# Altium PCB Button.PcbDoc
Units mil, origin at the board's own origin, x right, y up, seen from the top; angles counter-clockwise.
Board outline 5000 x 3000 mil, 2 copper layers (Top Layer, Bottom Layer), stack 61.756 mil thick; 11 components, 7 nets, 37 pads, 0 vias.
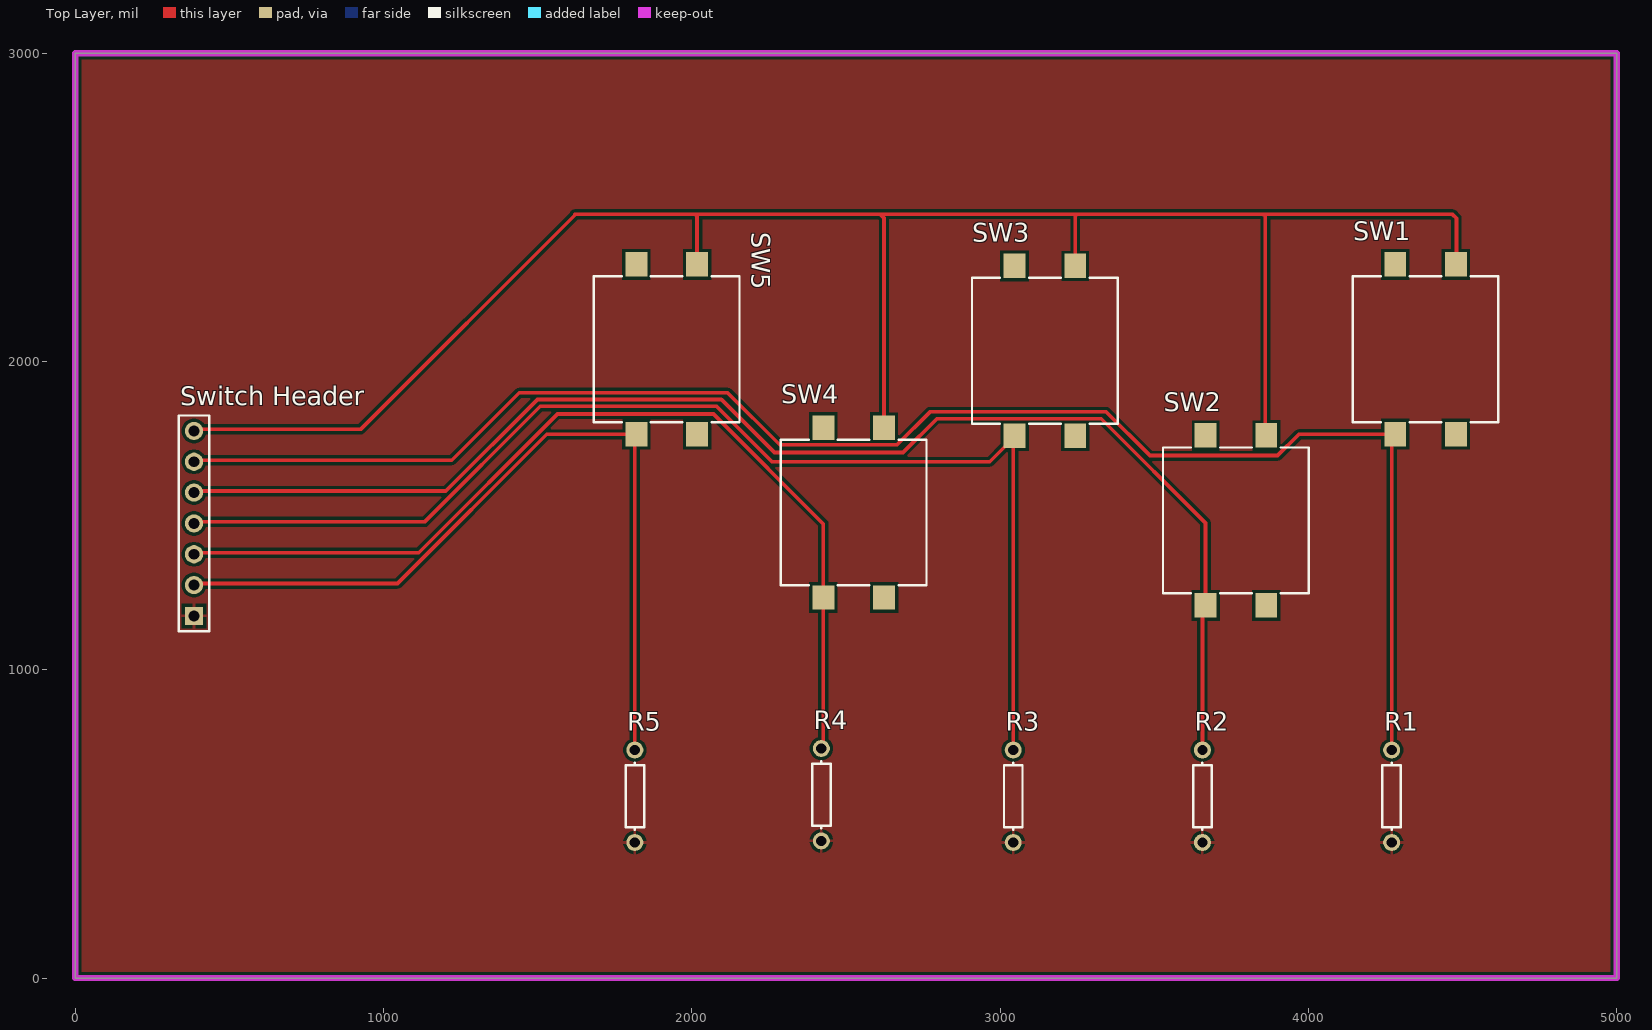
[diagram p0: Top Layer view]
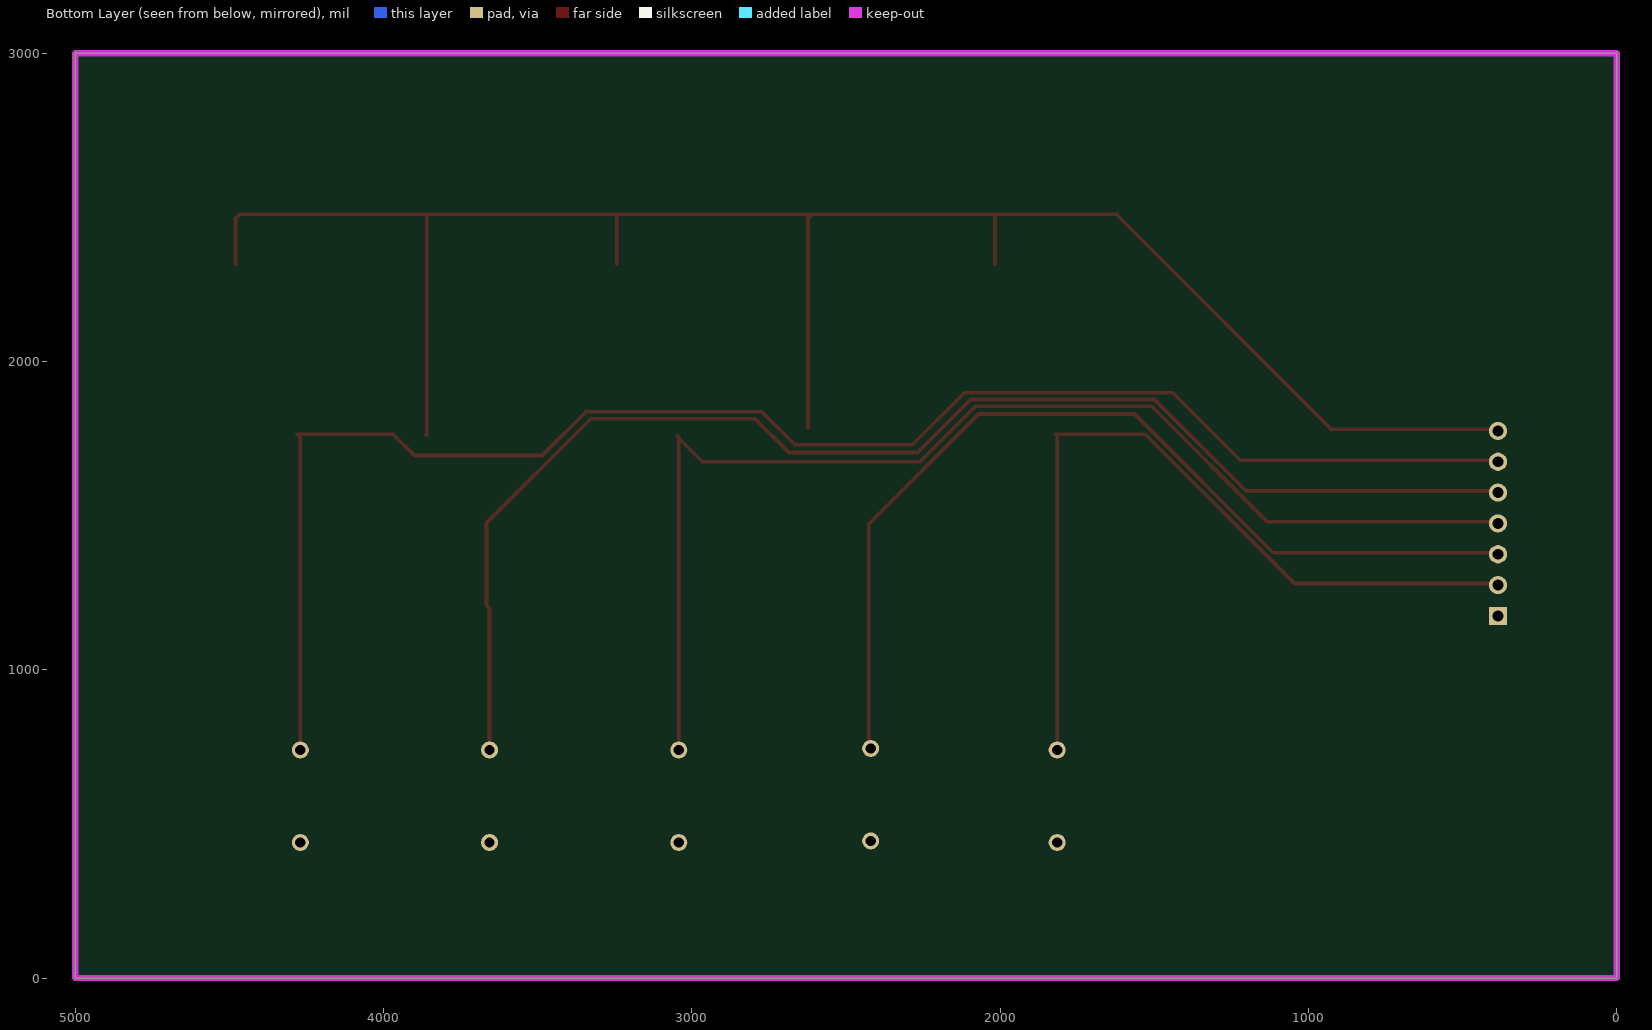
[diagram p1: Bottom Layer view, seen from below]

## Layer stack, top to bottom
Top Solder: solder mask 1, SM-001, Dk 4
Top Layer: signal copper 1.378
Dielectric 1: core 59, Core-043, Dk 4.3
Bottom Layer: signal copper 1.378
Bottom Solder: solder mask 1, SM-001, Dk 4

## Board outline
0,0 5000,0 5000,3000 0,3000

## Design rules (kind name [scope] priority, off if disabled: settings)
Clearance [All] p1: gap=10 ignorepadtopadclearanceinfootprint=FALSE except(0: Arc-Hole Track-Hole SMDPad-Hole THPad-Hole Via-Hole Fill-Hole Poly-Hole Region-Hole Text-Hole)
PolygonConnect [All] p1: connectstyle=Relief reliefconductorwidth=10 reliefentries=4 polygonreliefangle="90 Angle" airgapwidth=10
RoutingVias [All] p1: holewidth=28 width=50 viastyle="Through Hole" minholewidth=28 minwidth=50 maxholewidth=28 maxwidth=50
SolderMaskExpansion [All] p1: expansion=4 istentingtop=FALSE
Width [All] p1: maxlimit=10 minlimit=10 preferedwidth=10
30 further rules are at their usual default settings.

## Components (designator, comment, footprint, x,y, rotation, side; value= is the part's Value field where it differs from the comment)
R1 "Res1" AXIAL-0.3 4270,590 r270 top value=1K
R2 "Res1" AXIAL-0.3 3656.25,590 r270 top value=1K
R3 "Res1" AXIAL-0.3 3042.5,590 r270 top value=1K
R4 "Res1" AXIAL-0.3 2420,595 r270 top value=1K
R5 "Res1" AXIAL-0.3 1815,590 r270 top value=1K
SW1 "430172073816" WS-TASV_L12W12H7.3_4301x20738x6 4380,2040 r270 top
SW2 "430172073816" WS-TASV_L12W12H7.3_4301x20738x6 3764.61,1485 r270 top
SW3 "430172073816" WS-TASV_L12W12H7.3_4301x20738x6 3145,2035 r270 top
SW4 "430172073816" WS-TASV_L12W12H7.3_4301x20738x6 2525,1510 r270 top
SW5 "430172073816" WS-TASV_L12W12H7.3_4301x20738x6 1918.43,2040 r270 top
"Switch Header" "Header 7" HDR1X7 385,1175 r90 top

## Footprints (in the part's own frame and the unit in brackets; to place one, negate y for a bottom-side part, rotate by r counter-clockwise, add the part's x,y. Pads: shape width x height; smd on the part's side, far side on the other; paste and mask are expansions set on the pad)
AXIAL-0.3 [mm] "Axial Device, Thru-Hole; 2 Leads; 0.3 in Pin Spacing"
  round 1.4 hole 0.85: 1(-3.81,0) 2(3.81,0)
  silkscreen extent -2.77,-0.76 2.77,0.76
HDR1X7 [mm] "Connector; Header; 7 Position"
  rect 1.5x1.5 hole 0.9: 1(0,0)
  round 1.5 hole 0.9: 2(2.54,0) 3(5.08,0) 4(7.62,0) 5(10.16,0) 6(12.7,0) 7(15.24,0)
  silkscreen extent -1.27,-1.27 16.51,1.27
WS-TASV_L12W12H7.3_4301x20738x6 [mm] "Tact Switch, SMD, body 12x12mm"
  rect 2x1.8 smd: A1(-7,2.5) A2(7,2.5) B1(-7,-2.5) B2(7,-2.5)
  silkscreen extent -6,-6 6,6, body extent -7.65,-6 7.65,6, height 7.3

## Part data
R1 R2 R3 R4 R5: "Resistor", LatestRevisionDate=17-Jul-2002, LatestRevisionNote="Re-released for DXP Platform.", PackageDescription="Axial Device, Thru-Hole; 2 Leads; 0.3 in Pin Spacing", PackageReference=AXIAL-0.3, Published=8-Jun-2000, Publisher="Altium Limited"
SW1 SW2 SW3 SW4 SW5: "WS-TASV SMT Tact Switch, L12 x W12 x H7.3mm, 160g, SPST-NO, 12V, 50mA", Manufacturer="Wurth Elektronik", Operating Temperature Max=85°C, Operating Temperature Min=-40°C, Rated Current=50mA, Rated Voltage (DC)=12V, Category="Tact Switches", Circuit=SPST-NO, ComponentLink1Description="Website Link", ComponentLink1URL=https://www.we-online.com/redexpert/article/430172073816?ad, ComponentLink2Description="Datasheet Link", ComponentLink2URL=https://www.we-online.com/redexpert/spec/430172073816?ad, Contact Material="Stainless Steel", Contact Plating=Silver, Height=7.3mm, Length=12mm, Manufacturer Part Number=430172073816, Match Code=WS-TASV, Mount="Surface Mount", Operation Force=160g, Packaging="Tape and Reel", Terminal Material="Copper Alloy", Terminal Plating=Silver, Washable=No, Width=12mm
"Switch Header": "Header, 7-Pin", LatestRevisionDate=17-Jul-2002, LatestRevisionNote="Re-released for DXP Platform.", Publisher="Altium Limited"

## Nets (pads, with @x,y where several pads share a name; then routed paths per layer and width w, separated by ;. In a path a pad name is that pad's centre, name@x,y a point inside that pad or via, vN(x,y) a via of type N, cw(c..) or ccw(c..) an arc to the next point about the centre after c; other vN are vias at no path point)
5V: "Switch Header.7" SW1.A1 SW2.A1 SW3.A1 SW4.A1 SW5.A1 | length 6283.6
  Top Layer w12: 385,1775 390,1780 925,1780 1620,2475 ; 1620,2477.43 2010.99,2477.43 ; SW5.A1 2016.85,2469.14 ; 2016.85,2471.57 2010.99,2477.43 ; SW4.A1 2623.43,2463.29 ; 2623.43,2465.72 2611.72,2477.43 ; SW3.A1@3243.43,2316.45 3243.43,2477.43 ; 3243.43,2474.01 3246.85,2477.43 2611.72,2477.43 ; 3246.85,2475 3249.28,2477.43 3854.14,2477.43 ; SW2.A1@3860,1763.62 SW2.A1 ; SW2.A1@3860,1769.48 3860,2477.43 ; 3860,2471.57 3854.14,2477.43 ; SW1.A1 4480,2317.17 4480,2465 4467.57,2477.43 3854.14,2477.43 ; 2010.99,2477.43 2611.72,2477.43
GND: "Switch Header.1" R1.2 R2.2 R3.2 R4.2 R5.2 | length 21.2
  Top Layer w10: 385,1175 390,1180 ; R5.2 R5.2@1817.5,442.5 ; R4.2@2417.5,442.5 R4.2 R4.2@2422.5,442.5 ; R3.2@3040,442.5 R3.2
SW1: "Switch Header.6" R1.1 SW1.B2 | length 5220.3
  Top Layer w12: 385,1675 390,1680 1221.35,1680 1440.35,1899 2116,1899 2285,1730 2665.27,1730 2772.08,1836.81 3344.3,1836.81 3486.11,1695 3900,1695 3969.41,1764.41 SW1.B2 4270,1752.83 R1.1
SW2: "Switch Header.5" R2.1 SW2.B2 | length 4403.9
  Top Layer w12: 385,1575 390,1580 1201.96,1580 1498.96,1877 2095.74,1877 2267.74,1705 2685,1705 2794.81,1814.81 3328.16,1814.81 3666.18,1476.79 SW2.B2 3656.25,1199.48 R2.1
SW3: "Switch Header.4" R3.1 SW3.B2 | length 3942.2
  Top Layer w12: 385,1475 390,1480 1133.07,1480 1508.07,1855 2080,1855 2260,1675 2966.1,1675 SW3.B2@3042.5,1751.4 ; R3.1 SW3.B2@3042.5,1751.4 ; SW3.B2 3042.5,1755.33 SW3.B2@3042.5,1751.4
SW4: "Switch Header.3" R4.1 SW4.B2 | length 3108.9
  Top Layer w12: 385,1375 390,1380 1113.89,1380 1563.89,1830 2070,1830 2426.57,1473.43 SW4.B2 2426.57,751.57 R4.1
SW5: "Switch Header.2" R5.1 SW5.B2 | length 2664.2
  Top Layer w12: 385,1275 390,1280 1045,1280 1529.41,1764.41 SW5.B2 1815,1759.41 R5.1
pads on no net: SW1.A2 SW1.B1 SW2.A2 SW2.B1 SW3.A2 SW3.B1 SW4.A2 SW4.B1 SW5.A2 SW5.B1

## Polygon pours and split planes (outlines as drawn)
GND on Top Layer "GND_L01_P000" (solid, pour order 0): 0,0 0,3000 5000,3000 5000,0

## Keep-outs
Keep-Out Layer:
  the board outline again, w20